# Altium PCB motor_driver_current_sensor.PcbDoc
Units mil, origin at the board's own origin, x right, y up, seen from the top; angles counter-clockwise.
Board outline 6000 x 4000 mil, 2 copper layers (Top Layer, Bottom Layer); 12 components, 13 nets, 49 pads, 3 vias.
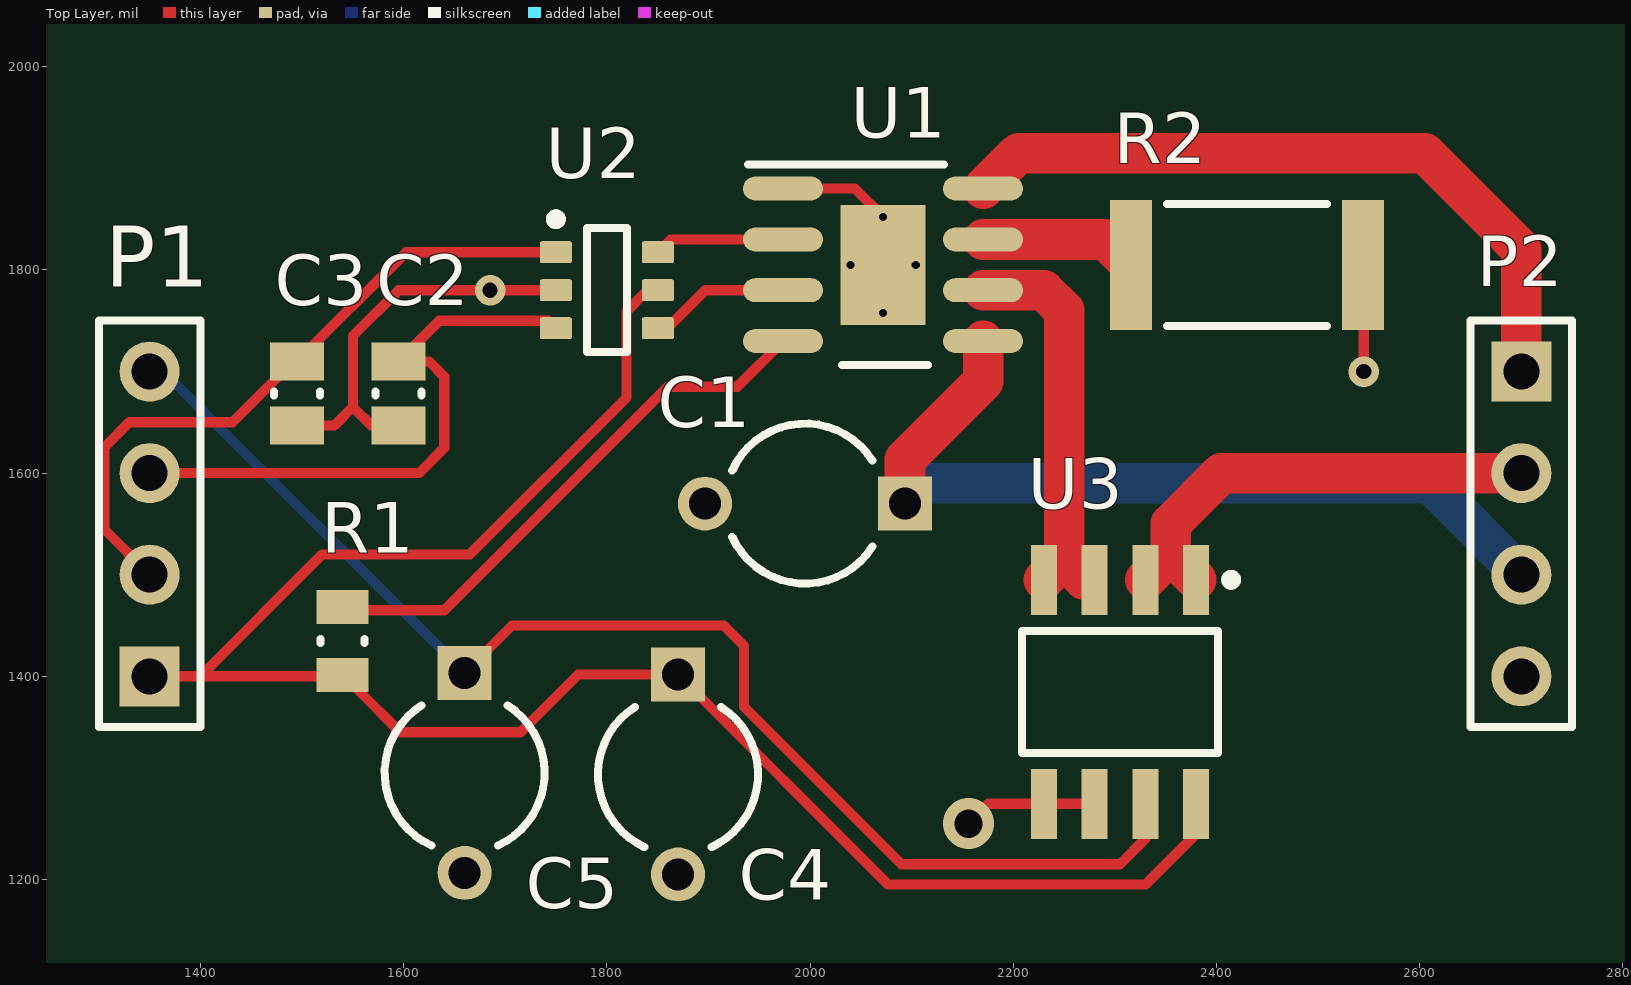
[diagram p0: Top Layer view]
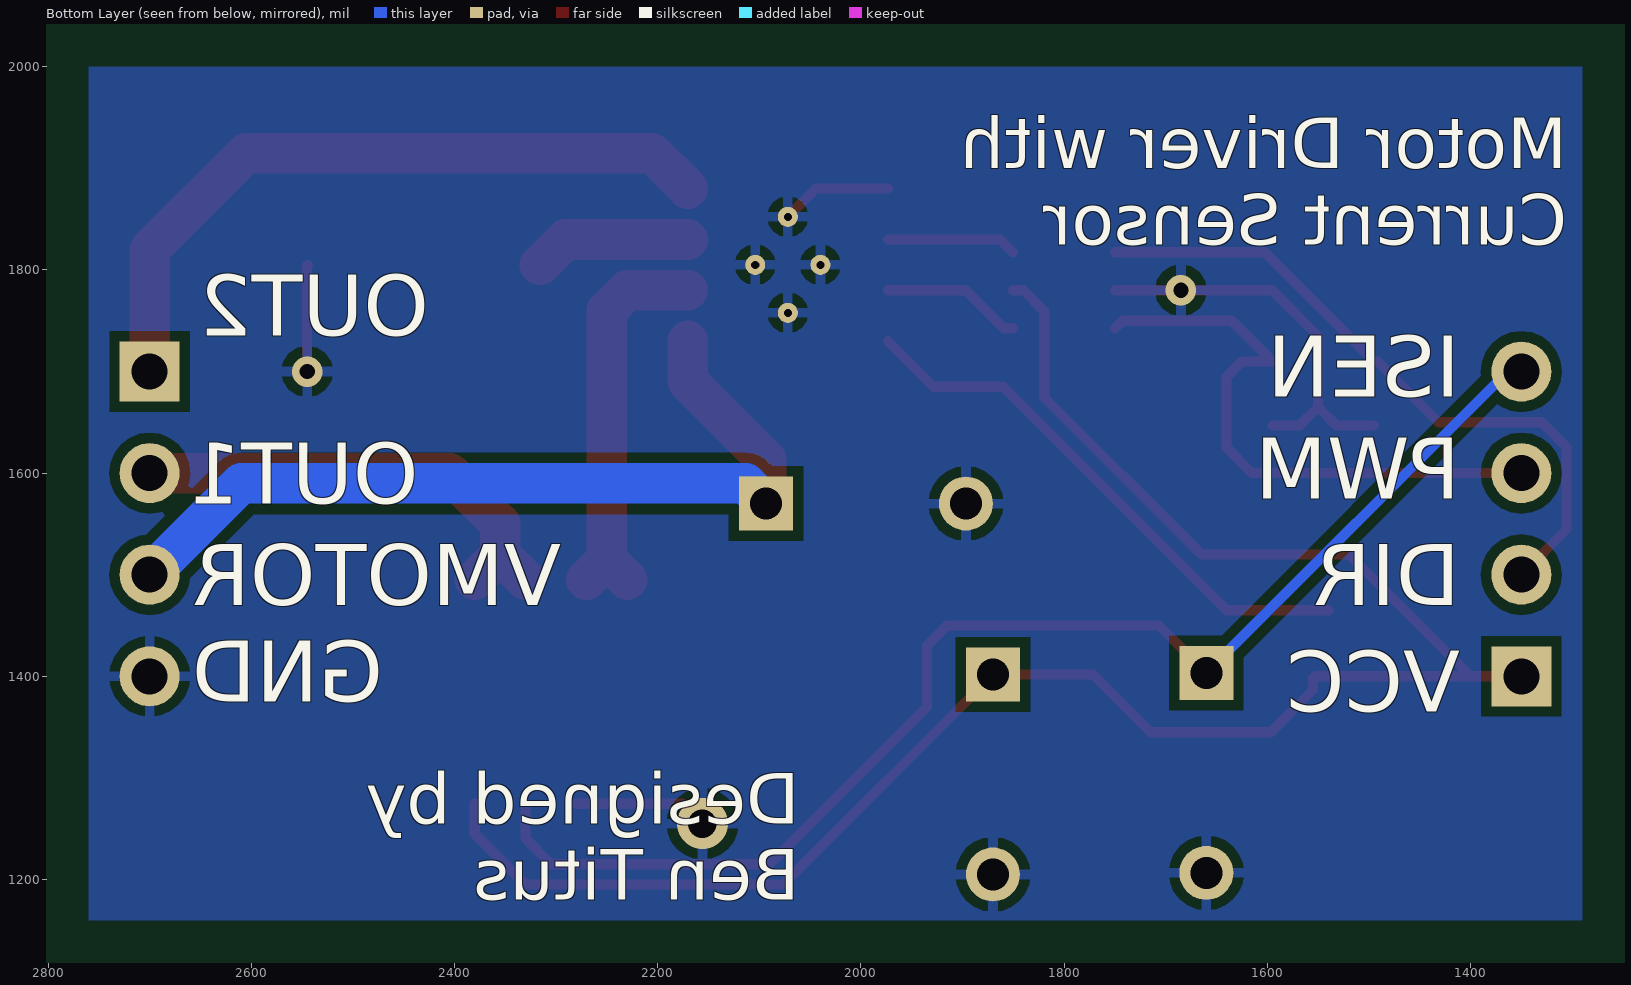
[diagram p1: Bottom Layer view, seen from below]

## Layer stack, top to bottom
Top Solder: solder mask 0.4, Solder Resist, Dk 3.5
Top Layer: signal copper 1.4
Dielectric 1: dielectric 12.6, FR-4, Dk 4.8
Bottom Layer: signal copper 1.4
Bottom Solder: solder mask 0.4, Solder Resist, Dk 3.5

## Board outline
1000,1000 7000,1000 7000,5000 1000,5000

## Design rules (kind name [scope] priority, off if disabled: settings)
Clearance [All] p1: gap=10 ignorepadtopadclearanceinfootprint=FALSE except(0: Arc-Hole Track-Hole SMDPad-Hole THPad-Hole Via-Hole Fill-Hole Poly-Hole Region-Hole Text-Hole)
PolygonConnect [All] p1: connectstyle=Relief reliefconductorwidth=10 reliefentries=4 polygonreliefangle="90 Angle" airgapwidth=10
RoomDefinition motor_driver_current_sensor [InComponentClass('motor_driver_current_sensor')] p1: confinementstyle=ConfineIn formatcopy=TRUE lockcomponents=FALSE outline 1290,1160 2760,1160 2760,2000 1290,2000
RoutingVias [All] p1: holewidth=28 width=50 viastyle="Through Hole" minholewidth=15 minwidth=30 maxholewidth=28 maxwidth=50
SolderMaskExpansion [All] p1: expansion=4
Width [All] p1: maxlimit=50 minlimit=10 preferedwidth=10
30 further rules are at their usual default settings.

## Components (designator, comment, footprint, x,y, rotation, side; value= is the part's Value field where it differs from the comment)
C1 "100uF" CAPR5-4X5 1995,1570 r180 top
C2 "10nF" CAPC0805(2012)145_L 1595,1678.5 r90 top
C3 "10nF" CAPC0805(2012)145_L 1495,1678.5 r90 top
C4 "0.1uF" CAPR5-4X5 1870,1303.43 r270 top
C5 "0.1uF" CAPR5-4X5 1660,1305 r270 top
P1 "Header 4" HDR1X4 1350,1400 r90 top
P2 "Header 4" HDR1X4 2700,1700 r270 top
R1 "10k" RESC0805(2012)_L 1540,1435 r90 top
R2 "0.1 Shunt Resistor" RESC2512(6432)_L 2430,1805 r180 top
U1 "DRV8872DDAR" DDA0008H_N 2071.89,1805 r0 top value=Value
U2 "SN74LVC1G18DBVR" DBV0006A_L 1800,1780 r0 top
U3 "ACS722LLCTR-05AB-T" ALEG-LC-8_V 2305,1384.76 r180 top

## Footprints (in the part's own frame and the unit in brackets; to place one, negate y for a bottom-side part, rotate by r counter-clockwise, add the part's x,y. Pads: shape width x height; smd on the part's side, far side on the other; paste and mask are expansions set on the pad)
ALEG-LC-8_V [mm] "SOIC, 8-Leads, Body 4.9x3.9mm, Pitch 1.27mm"
  rect 0.65x1.75 smd: 1(-1.905,-2.8) 2(-0.635,-2.8) 3(0.635,-2.8) 4(1.905,-2.8) 5(1.905,2.8) 6(0.635,2.8) 7(-0.635,2.8) 8(-1.905,2.8)
  silkscreen extent -2.91,-2.92 2.45,1.53, body extent -2.45,-1.95 2.45,1.95, height 1.75
CAPC0805(2012)145_L [mm]
  rect 0.95x1.35 smd: 1(-0.8,0) 2(0.8,0)
  silkscreen extent -0.05,-0.58 0.05,0.58, body extent -1.1,-0.72 1.1,0.72, height 1.45
CAPR5-4X5 [mm] "Capacitor; 2 Leads"
  rect 1.35x1.35 hole 0.8: 1(-2.5,0)
  round 1.35 hole 0.8: 2(2.5,0)
  silkscreen extent -1.69,-2 1.82,2
DBV0006A_L [mm] "SOT23, 6-Leads, Body 3.05x1.75mm, Pitch 0.95mm, IPC High Density"
  rrect18% 0.8x0.55 smd: 1(-1.275,0.95) 2(-1.275,0) 3(-1.275,-0.95) 4(1.275,-0.95) 5(1.275,0) 6(1.275,0.95)
  silkscreen extent -1.4,-1.55 0.5,1.9, body extent -1.42,-1.46 1.42,1.46, height 1.11
DDA0008H_N [mm]
  oval 2x0.6 smd paste+0 mask+0.051: 1(-2.5,1.905) 2(-2.5,0.635) 3(-2.5,-0.635) 4(-2.5,-1.905) 5(2.5,-1.905) 6(2.5,-0.635) 7(2.5,0.635) 8(2.5,1.905)
  rect 2.13x3 smd paste+0 mask+0.051: 9(0,0)
  round 0.5 / inner round 1.524 / far side round 0.5 hole 0.203 mask+0.051: V(-0.815,0) V(0,-1.2) V(0,1.2) V(0.815,0)
  silkscreen extent -3.38,-2.5 1.53,2.51, body extent 0,0 0.25,0.25, height 0.25
HDR1X4 [mm] "Connector; Header; 4 Position"
  rect 1.5x1.5 hole 0.9: 1(0,0)
  round 1.5 hole 0.9: 2(2.54,0) 3(5.08,0) 4(7.62,0)
  silkscreen extent -1.27,-1.27 8.89,1.27
RESC0805(2012)_L [mm]
  rect 0.85x1.3 smd: 1(-0.85,0) 2(0.85,0)
  silkscreen extent -0.05,-0.55 0.05,0.55, body extent -1.1,-0.67 1.1,0.68, height 0.7
RESC2512(6432)_L [mm]
  rect 1.05x3.25 smd: 1(-2.9,0) 2(2.9,0)
  silkscreen extent -2,-1.52 2,1.53, body extent -3.25,-1.7 3.25,1.7, height 0.75

## Part data
C1: library part Cap2, "100uF Filter Capacitor", PackageDescription="Capacitor; 2 Leads", PackageReference=CAPR5-4X5, Published=23-Sep-2002, Publisher="Altium Limited"
C2 C3: library part CMP-1590-00003-1, "0805 (2012 Metric) Chip Capacitor", Case-EIA=0805, Case-Metric=2012, PackageReference=CAPC0805(2012)145
C4 C5: library part Cap2, "Capacitor", PackageDescription="Capacitor; 2 Leads", PackageReference=CAPR5-4X5, Published=23-Sep-2002, Publisher="Altium Limited"
P1 P2: "Header, 4-Pin", LatestRevisionDate=17-Jul-2002, LatestRevisionNote="Re-released for DXP Platform.", Publisher="Altium Limited"
R1: library part CMP-1591-00002-1, "0805 (2012 Metric) Chip Resistor", Case-EIA=0805, Case-Metric=2012, PackageReference=RESC0805(2012)
R2: library part CMP-1591-00007-1, "2512 (6432 Metric) Chip Resistor", Case-EIA=2512, Case-Metric=6432, PackageReference=RESC2512(6432)
U1: "Imported", Alternate_PartNumber=DRV8872DDA, Manufacturer="Texas Instruments", CompType=IC, MountType=SMT, PackageReference=DDA0008H, PartNumber=DRV8872DDAR, PIN_COUNT=9, RefDes=RefDes, TYPE=TYPE
U2: library part CMP-0859-00184-3, "One of Two Noninverting Demultiplexer with 3-State Deselected Output, DBV0006A, LARGE T&R", F @ Nom Voltage(Max)(Mhz)=150, Generic Part Number=SN74LVC1G18, ICC @ Nom Voltage(Max)(mA)=0.01, Manufacturer="Texas Instruments", Operating Temperature Range(C)="-40 to 85", Rating=Catalog, tpd @ Nom Voltage(Max)(ns)=9.3,5,4.2,3.2, Voltage(Nom)(V)=1.8,2.5,3.3,5, 3-State Output=No, Bits(#)=1, DatasheetVersion=SCES406K, Input Type=CMOS/TTL, Logic=True, Output Drive (IOL/IOH)(Max)(mA)=32/-32, Output Type=CMOS, PackageReference=DBV0006A, Schmitt Trigger=No, Specialty Logic Family=Decoder/Encoder/Multiplexer, Sub-Family=Decoder/Encoder/Multiplexer, Technology Family=LVC, VCC(Max)(V)=5.5, VCC(Min)(V)=1.65
U3: library part CMP-1557-00006-1, "High Accuracy, Galvanically Isolated Current Sensor IC, 3 to 3.6 V, -5 to 5 A IP, -40 to 150 degC, 8-Pin SOIC (LC), RoHS, Tape and Reel", Temperature Max="150 degC", Temperature Min="-40 degC", ComponentLink1Description="Manufacturer URL", ComponentLink1URL=http://www.allegromicro.com/, ComponentLink2Description=Datasheet, ComponentLink2URL=http://www.allegromicro.com/~/media/Files/Datasheets/ACS722-Datasheet.ashx?la=en, ComponentLink3Description="Package Specification", ComponentLink3URL=http://www.allegromicro.com/~/media/Files/Datasheets/ACS711-Datasheet.ashx?la=en, IP Max="5 A", IP Min="-5 A", Mounting Technology="Surface Mount", PackageDescription="8-Pin Small Outline Integrated Package, Body 4.9 x 3.9 mm, Pitch 1.27 mm", Packing="Tape and Reel", PartNumber=ACS722LLCTR-05AB-T, RoHS=TRUE, VCC Max="3.6 V", VCC Min="3 V"

## Via types
v1: diameter 30, hole 15, Top Layer to Bottom Layer, 2 vias
v2: diameter 50, hole 28, Top Layer to Bottom Layer, 1 vias

## Nets (pads, with @x,y where several pads share a name; then routed paths per layer and width w, separated by ;. In a path a pad name is that pad's centre, name@x,y a point inside that pad or via, vN(x,y) a via of type N, cw(c..) or ccw(c..) an arc to the next point about the centre after c; other vN are vias at no path point)
+12: C1.1 P2.3 U1.5 | length 844
  Top Layer w40: C1.1 2093.43,1613.43 2170.31,1690.31 U1.5
  Bottom Layer w40: C1.1 2113.43,1590 2610,1590 P2.3
A_Demux: C2.2 P1.3 U2.3 | length 596
  Top Layer w10: P1.3 1615,1600 1640,1625 1640,1695 1625,1710 C2.2 1635,1750 1742.4,1750 U2.3
GND: C1.2 C2.1 C3.1 C4.2 C5.2 P2.4 R2.1 U1.1 U1.9 U1.V U2.2 U3.5 U3.6 | length 750.8
  Top Layer w10: C3.1 1532.01,1647.01 1550,1665 ; C2.1 1567.99,1647.01 1550,1665 ; U2.2 1595,1780 1550,1735 1550,1665 ; U1.1 2044.13,1880 U1.V@2071.89,1852.24 ; v2(2155.94,1255) 2175.47,1274.53 U3.5 U3.6 ; R2.1 2545,1804.17 v1(2545,1700)
  other v1: 1685,1780
IN1: U1.3 U2.4 | length 138.8
  Top Layer w10: U2.4 1859.44,1742.6 1896.84,1780 U1.3
IN2: U1.2 U2.6 | length 128.5
  Top Layer w10: U2.6 1862.8,1830 U1.2
NetC5_1: C5.1 P1.4 U3.7 | length 1299.5
  Top Layer w10: C5.1 1706.58,1450 1915,1450 1935,1430 1935,1370 2090,1215 2305,1215 2330,1240 U3.7
  Bottom Layer w10: P1.4 1363.43,1700 C5.1
NetP2_1: P2.1 U1.8 | length 703.5
  Top Layer w40: U1.8 2205.32,1915 2605,1915 2700,1820 P2.1
NetR1_2: R1.2 U1.4 | length 543.2
  Top Layer w10: R1.2@1540,1465 1640,1465 1860,1685 1928.46,1685 U1.4
NetR2_2: R2.2 U1.7 | length 155.9
  Top Layer w40: U1.7 2290.83,1830 R2.2
OUT1: U1.6 U3.3 U3.4 | length 399.5
  Top Layer w10: U3.3@2270,1495 U3.3
  Top Layer w40: U1.6 2230,1780 2250,1760 2250,1515 ; U3.4 2250,1515 ; U3.3@2270,1495 2250,1515
P2_2: P2.2 U3.1 U3.2 | length 466.4
  Top Layer w40: U3.2 2355,1520 ; U3.1 2355,1520 ; P2.2 2405,1600 2355,1550 2355,1520
S_Demux: C3.2 P1.2 U2.1 | length 667.7
  Top Layer w10: P1.2 1305.47,1544.53 1305.47,1625.47 1330,1650 1431.5,1650 1491.5,1710 C3.2 1602.4,1817.4 U2.1
VCC: C4.1 P1.1 R1.1 U2.5 U3.8 | length 1876.4
  Top Layer w10: P1.1 1400,1400 ; U2.5 1840,1780 1819.45,1759.45 1819.45,1674.45 1665,1520 1520,1520 1400,1400 ; U3.8 2380,1245 2330,1195 2076.85,1195 C4.1 1771.85,1401.85 1715,1345 1596.54,1345 1555,1386.54 1555,1398.07 1553.07,1400 1400,1400

## Polygon pours and split planes (outlines as drawn)
GND on Bottom Layer "GND_L02_P000" (solid, pour order 0): 1290,1160 2760,1160 2760,2000 1290,2000

## Silkscreen, mask and mechanical layers (free items; w line width, h text height)
Bottom Overlay:
  text "Motor Driver with / Current Sensor" at 1305,1825 h50
  text "OUT2" at 2425,1735 h60
  text "ISEN" at 1410,1675 h60
  text "PWM" at 1410,1575 h60
  text "OUT1" at 2435,1570 h60
  text "DIR" at 1410,1470 h60
  text "VMOTOR" at 2295,1470 h60
  text "GND" at 2470,1375 h60
  text "VCC" at 1410,1365 h60
  text "Designed by / Ben Titus" at 2060,1180 h50
Drill Drawing:
  lines w10: 1290,1160 2760,1160 2760,2000 1290,2000 1290,1160